# Altium PCB AX309.REV.1.0.PcbDoc (part 6 of 10)
Units mil, origin at the board's own origin, x right, y up, seen from the top; angles counter-clockwise.
Board outline 5185 x 3614 mil, 4 copper layers (Top Layer, GND, Mid-Layer 1, Bottom Layer); 191 components, 352 nets, 1106 pads, 425 vias.
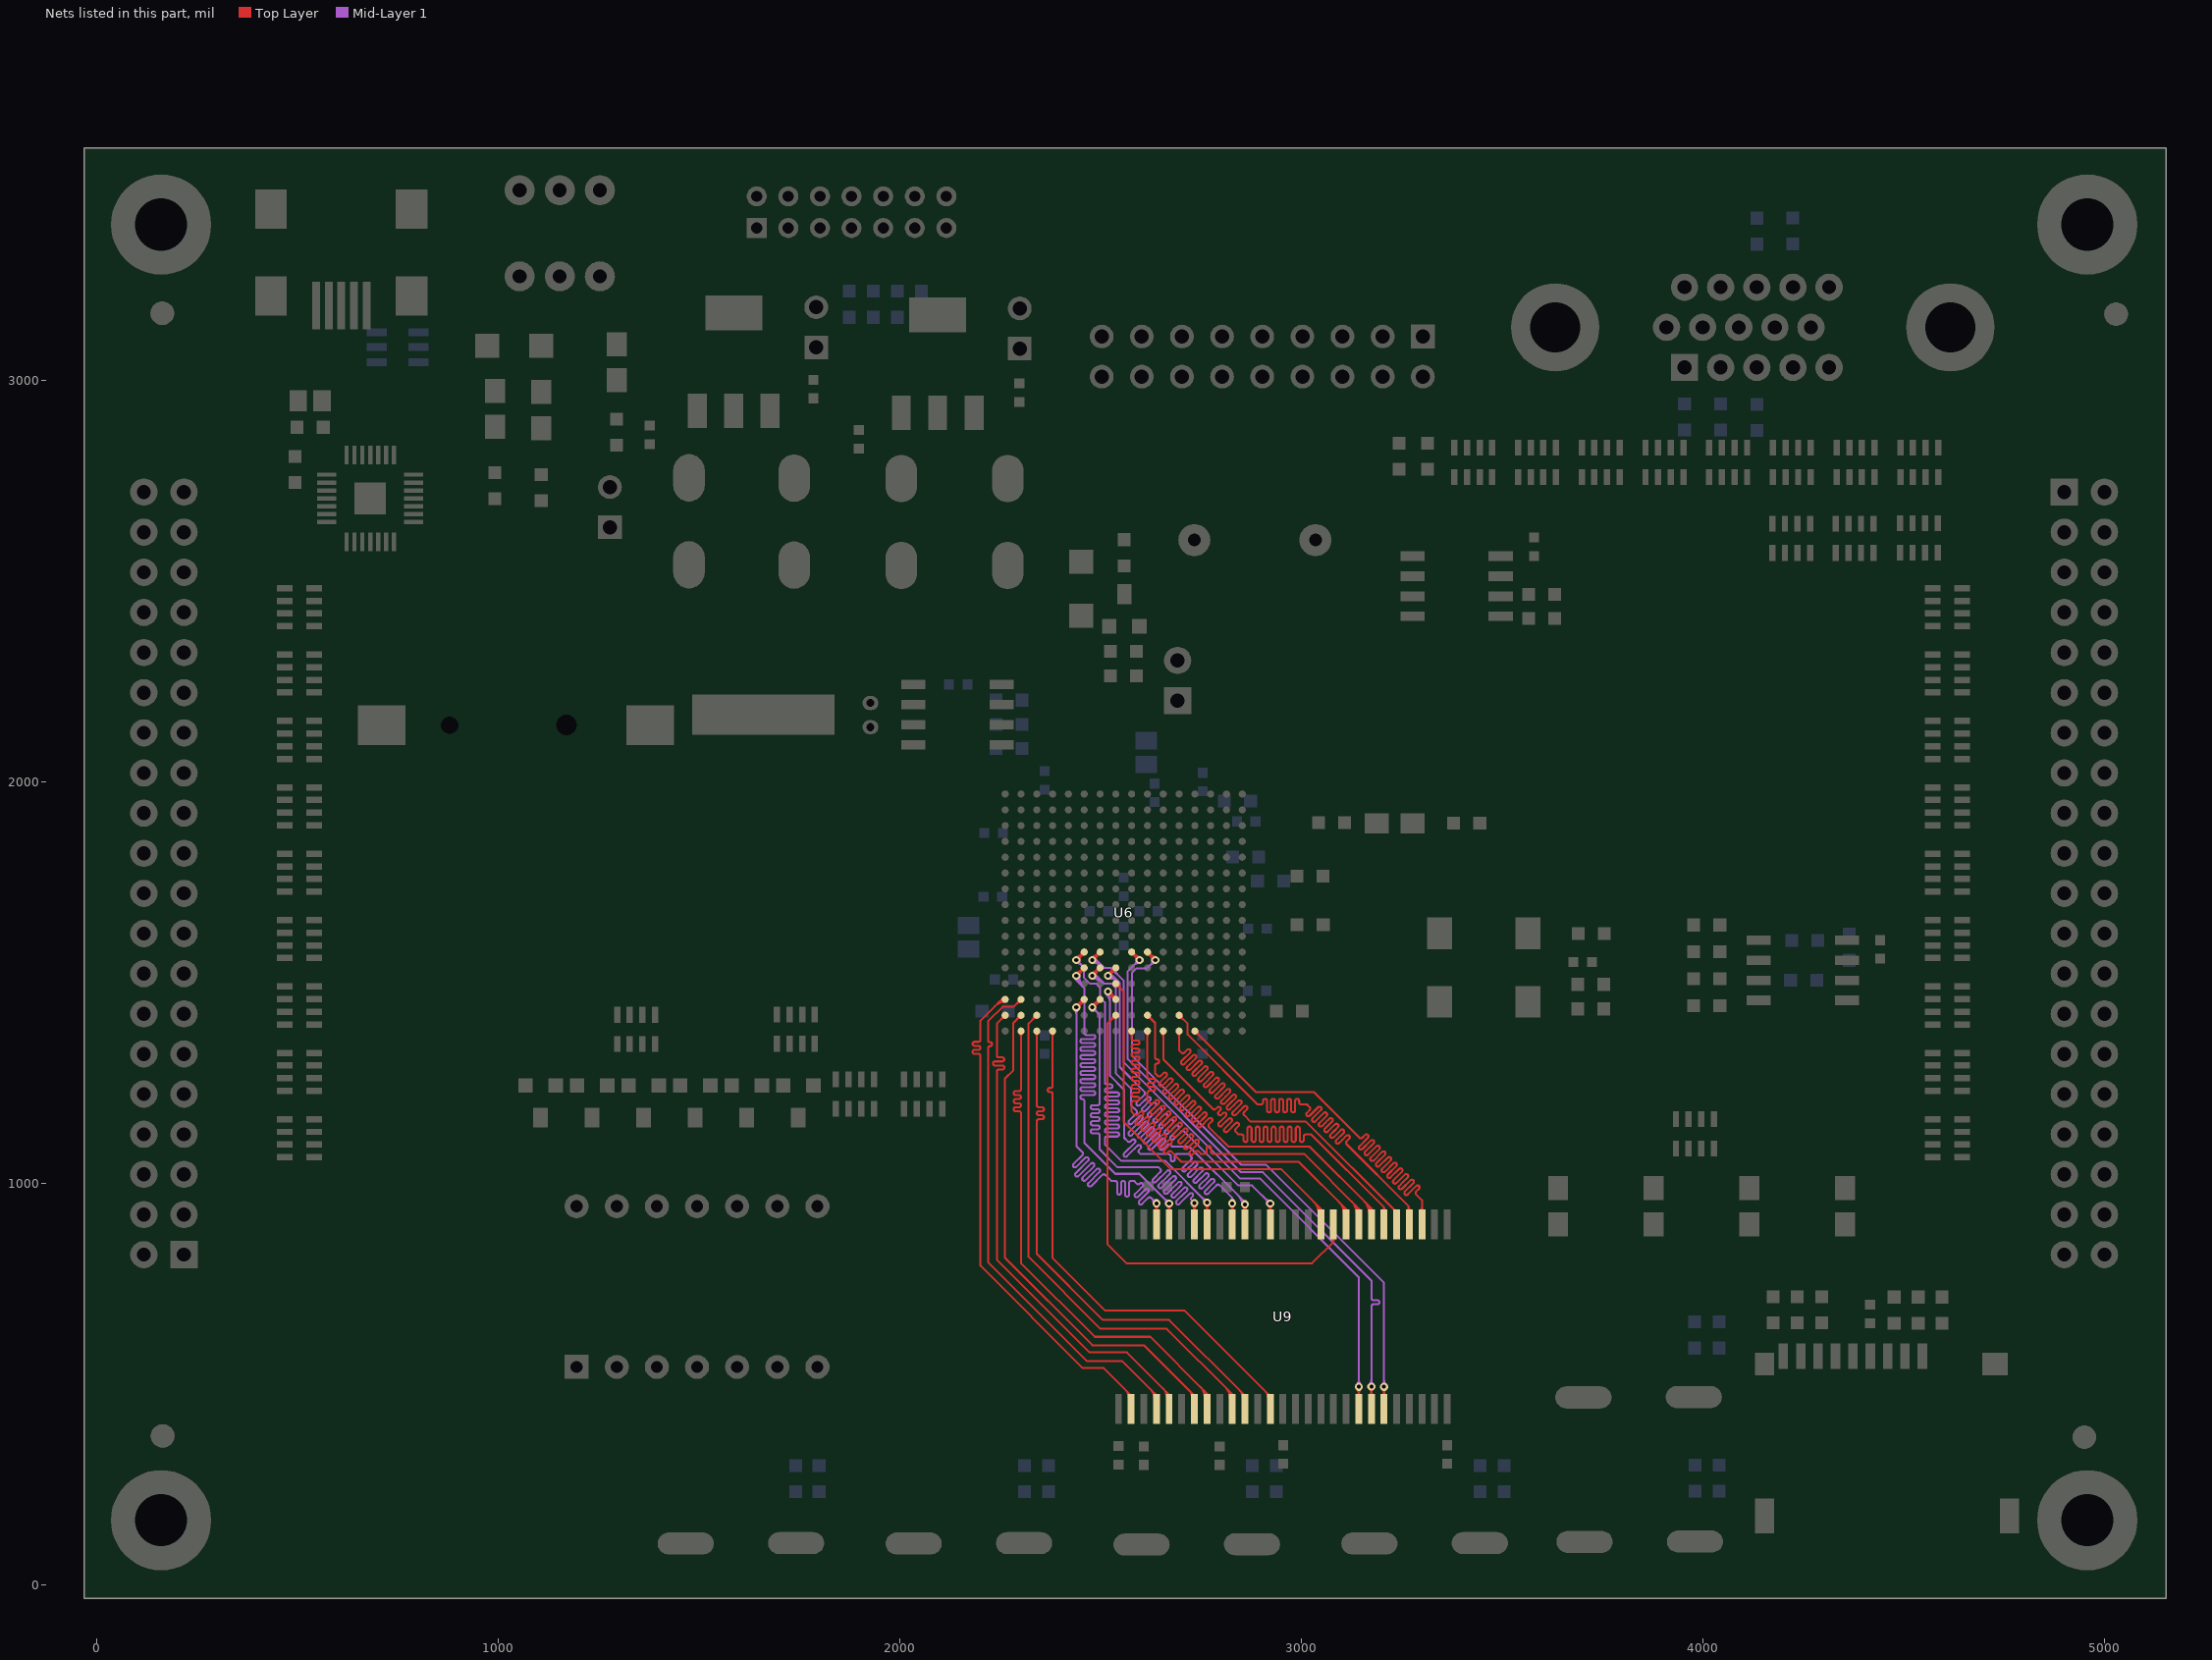
[diagram p8: the nets of this part, all layers, seen from the top]

## Via types
v1: diameter 20, hole 10, Top Layer to Bottom Layer, 328 vias
v2: diameter 30, hole 15, Top Layer to Bottom Layer, 95 vias
v3: diameter 40, hole 20, Top Layer to Bottom Layer, 2 vias

## Nets (pads, with @x,y where several pads share a name; then routed paths per layer and width w, separated by ;. In a path a pad name is that pad's centre, name@x,y a point inside that pad or via, vN(x,y) a via of type N, cw(c..) or ccw(c..) an arc to the next point about the centre after c; other vN are vias at no path point) (continued)
S_A5: U6.N1 U9.30 | length 1517.2
  Top Layer w5: U6.N1@2735.17,1372.37 cw(c2735.17,1357.02) 2746.02,1367.87 cw(c2756.87,1378.72) U6.N1@2741.52,1378.72 ; U6.N1@2735.17,1378.72 2886.89,1227 3031,1227 3145,1113 ccw(c3148.54,1116.54) 3152.07,1113 3159.06,1119.99 cw(c3162.6,1116.46) 3166.13,1119.99 cw(c3162.6,1116.46) 3166.13,1112.92 3145.08,1091.87 ccw(c3148.62,1088.33) 3145.08,1084.8 ccw(c3148.62,1088.33) 3152.15,1084.8 3173.2,1105.85 cw(c3176.74,1102.31) 3180.28,1105.85 cw(c3176.74,1102.31) 3180.28,1098.78 3159.22,1077.72 ccw(c3162.76,1074.19) 3159.22,1070.65 ccw(c3162.76,1074.19) 3166.29,1070.65 3187.35,1091.71 cw(c3190.88,1088.17) 3194.42,1091.71 cw(c3190.88,1088.17) 3194.42,1084.64 3173.36,1063.58 ccw(c3176.9,1060.05) 3173.36,1056.51 ccw(c3176.9,1060.05) 3180.43,1056.51 3201.49,1077.57 cw(c3205.02,1074.03) 3208.56,1077.57 cw(c3205.02,1074.03) 3208.56,1070.49 3187.51,1049.44 ccw(c3191.04,1045.9) 3187.51,1042.37 ccw(c3191.04,1045.9) 3194.58,1042.37 3215.63,1063.42 cw(c3219.17,1059.89) 3222.7,1063.42 cw(c3219.17,1059.89) 3222.7,1056.35 3201.65,1035.3 ccw(c3205.18,1031.76) 3201.65,1028.23 ccw(c3205.18,1031.76) 3208.72,1028.23 3229.77,1049.28 cw(c3233.31,1045.75) 3236.84,1049.28 cw(c3233.31,1045.75) 3236.84,1042.21 3215.79,1021.16 ccw(c3219.33,1017.62) 3215.79,1014.08 ccw(c3219.33,1017.62) 3222.86,1014.08 3243.92,1035.14 cw(c3247.45,1031.6) 3250.99,1035.14 cw(c3247.45,1031.6) 3250.99,1028.07 3229.93,1007.01 ccw(c3233.47,1003.48) 3229.93,999.94 ccw(c3233.47,1003.48) 3237,999.94 3258.06,1021 cw(c3261.59,1017.46) 3265.13,1021 cw(c3261.59,1017.46) 3265.13,1013.93 3254.6,1003.4 3244.07,992.87 ccw(c3247.61,989.34) 3244.07,985.8 ccw(c3247.61,989.34) 3251.15,985.8 3272.2,1006.85 cw(c3275.74,1003.32) 3279.27,1006.85 cw(c3275.74,1003.32) 3279.27,999.78 3258.22,978.73 ccw(c3261.75,975.19) 3258.22,971.66 ccw(c3261.75,975.19) 3265.29,971.66 3286.34,992.71 cw(c3289.88,989.18) 3293.41,992.71 cw(c3289.88,989.18) 3293.41,985.64 3286.42,978.65 ccw(c3289.96,975.11) 3286.42,971.58 3300.91,957.09 U9.30@3300.91,897 ; U9.30@3296.66,930.24 ccw(c3286.42,940.49) 3300.91,940.49 ccw(c3315.39,940.49) U9.30@3305.15,930.24
S_A6: U6.M2 U9.31 | length 1514.3
  Top Layer w5: U6.M2@2695.8,1411.74 cw(c2695.8,1396.39) 2706.65,1407.24 cw(c2717.5,1418.09) U6.M2@2702.15,1418.09 ; U6.M2@2695.8,1418.09 2717,1396.89 2717,1370 2891,1196 2900,1196 ccw(c2900,1201) 2905,1201 2905,1204.8 cw(c2910,1204.8) 2910,1209.8 cw(c2910,1204.8) 2915,1204.8 2915,1181.2 ccw(c2920,1181.2) 2920,1176.2 ccw(c2920,1181.2) 2925,1181.2 2925,1204.8 cw(c2930,1204.8) 2930,1209.8 cw(c2930,1204.8) 2935,1204.8 2935,1181.2 ccw(c2940,1181.2) 2940,1176.2 ccw(c2940,1181.2) 2945,1181.2 2945,1204.8 cw(c2950,1204.8) 2950,1209.8 cw(c2950,1204.8) 2955,1204.8 2955,1181.2 ccw(c2960,1181.2) 2960,1176.2 ccw(c2960,1181.2) 2965,1181.2 2965,1204.8 cw(c2970,1204.8) 2970,1209.8 cw(c2970,1204.8) 2975,1204.8 2975,1181.2 ccw(c2980,1181.2) 2980,1176.2 ccw(c2980,1181.2) 2985,1181.2 2985,1204.8 cw(c2990,1204.8) 2990,1209.8 cw(c2990,1204.8) 2995,1204.8 2995,1201 ccw(c3000,1201) 3000,1196 3014,1196 3021.07,1188.93 cw(c3017.54,1185.39) 3021.07,1181.86 3014.14,1174.93 ccw(c3017.68,1171.39) 3014.14,1167.86 ccw(c3017.68,1171.39) 3021.21,1167.86 3042.14,1188.79 cw(c3045.68,1185.25) 3049.22,1188.79 cw(c3045.68,1185.25) 3049.22,1181.72 3028.28,1160.78 ccw(c3031.82,1157.25) 3028.28,1153.71 ccw(c3031.82,1157.25) 3035.35,1153.71 3056.29,1174.65 cw(c3059.82,1171.11) 3063.36,1174.65 cw(c3059.82,1171.11) 3063.36,1167.58 3045.14,1149.35 ccw(c3048.67,1145.82) 3045.14,1142.28 ccw(c3048.67,1145.82) 3052.21,1142.28 3059.96,1150.04 3070.43,1160.51 cw(c3073.96,1156.97) 3077.5,1160.5 cw(c3073.96,1156.97) 3077.5,1153.43 3059.28,1135.21 ccw(c3062.81,1131.68) 3059.28,1128.14 ccw(c3062.81,1131.68) 3066.35,1128.14 3084.57,1146.36 cw(c3088.11,1142.83) 3091.64,1146.36 cw(c3088.11,1142.83) 3091.64,1139.29 3081.18,1128.82 3073.42,1121.07 ccw(c3076.96,1117.53) 3073.42,1114 ccw(c3076.96,1117.53) 3080.49,1114 3098.71,1132.22 cw(c3102.25,1128.69) 3105.78,1132.22 cw(c3102.25,1128.69) 3105.78,1125.15 3087.56,1106.93 ccw(c3091.1,1103.39) 3087.56,1099.86 ccw(c3091.1,1103.39) 3094.63,1099.86 3102.39,1107.61 3112.86,1118.08 cw(c3116.39,1114.54) 3119.93,1118.08 cw(c3116.39,1114.54) 3119.93,1111.01 3112.99,1104.08 ccw(c3116.53,1100.54) 3112.99,1097.01 3267.5,942.5 ; U9.31@3265.17,930.24 ccw(c3259.53,935.88) 3267.5,935.88 ; U9.31@3267.5,898.91 3267.5,942.5 ; U9.31@3273.17,930.68 cw(c3282.66,942.5) 3267.5,942.5
S_A7: U6.M1 U9.32 | length 1542
  Top Layer w5: U6.M1@2691.3,1374.23 cw(c2680.45,1363.37) 2695.8,1363.37 cw(c2711.15,1363.37) U6.M1@2700.29,1374.23 ; U6.M1@2695.8,1378.72 2695.8,1331.2 2702,1325 ccw(c2705.54,1328.54) 2709.07,1325 2716.1,1332.03 cw(c2719.64,1328.5) 2723.17,1332.03 cw(c2719.64,1328.5) 2723.17,1324.96 2702.04,1303.83 ccw(c2705.57,1300.29) 2702.04,1296.75 ccw(c2705.57,1300.29) 2709.11,1296.75 2730.25,1317.89 cw(c2733.78,1314.35) 2737.32,1317.89 cw(c2733.78,1314.35) 2737.32,1310.82 2716.18,1289.68 ccw(c2719.72,1286.15) 2716.18,1282.61 ccw(c2719.72,1286.15) 2723.25,1282.61 2744.39,1303.75 cw(c2747.92,1300.21) 2751.46,1303.75 cw(c2747.92,1300.21) 2751.46,1296.68 2730.32,1275.54 ccw(c2733.86,1272.01) 2730.32,1268.47 ccw(c2733.86,1272.01) 2737.39,1268.47 2758.53,1289.61 cw(c2762.06,1286.07) 2765.6,1289.61 cw(c2762.06,1286.07) 2765.6,1282.53 2744.47,1261.4 ccw(c2748,1257.86) 2744.47,1254.33 ccw(c2748,1257.86) 2751.54,1254.33 2772.67,1275.46 cw(c2776.21,1271.93) 2779.74,1275.46 cw(c2776.21,1271.93) 2779.74,1268.39 2758.61,1247.26 ccw(c2762.14,1243.72) 2758.61,1240.19 ccw(c2762.14,1243.72) 2765.68,1240.19 2786.81,1261.32 cw(c2790.35,1257.79) 2793.88,1261.32 cw(c2790.35,1257.79) 2793.88,1254.25 2772.75,1233.12 ccw(c2776.29,1229.58) 2772.75,1226.04 ccw(c2776.29,1229.58) 2779.82,1226.04 2800.96,1247.18 cw(c2804.49,1243.64) 2808.03,1247.18 cw(c2804.49,1243.64) 2808.03,1240.11 2786.89,1218.97 ccw(c2790.43,1215.44) 2786.89,1211.9 ccw(c2790.43,1215.44) 2793.96,1211.9 2815.1,1233.04 cw(c2818.63,1229.5) 2822.17,1233.04 cw(c2818.63,1229.5) 2822.17,1225.97 2811.6,1215.4 2801.64,1205.43 ccw(c2805.17,1201.9) 2801.64,1198.36 ccw(c2805.17,1201.9) 2808.71,1198.36 2818.67,1208.33 2829.24,1218.89 cw(c2832.78,1215.36) 2836.31,1218.89 cw(c2832.78,1215.36) 2836.31,1211.82 2825.74,1201.26 2815.78,1191.29 ccw(c2819.32,1187.76) 2815.78,1184.22 ccw(c2819.32,1187.76) 2822.85,1184.22 2832.81,1194.19 2843.38,1204.75 cw(c2846.92,1201.22) 2850.45,1204.75 cw(c2846.92,1201.22) 2850.45,1197.68 2839.89,1187.11 2829.92,1177.15 ccw(c2833.46,1173.61) 2829.92,1170.08 ccw(c2833.46,1173.61) 2836.99,1170.08 2846.96,1180.04 2857.52,1190.61 cw(c2861.06,1187.07) 2864.6,1190.61 cw(c2861.06,1187.07) 2864.6,1183.54 2857.56,1176.51 ccw(c2861.1,1172.97) 2857.56,1169.44 2874,1153 3012,1153 U9.32@3237.91,927.09 ; 3226.9,938.1 cw(c3214.8,926) U9.32@3231.91,926 ; 3229.53,935.47 ccw(c3237.91,943.86) U9.32@3237.91,932
S_A8: U6.L1 U9.33 | length 1539.8
  Top Layer w5: U6.L1@2651.93,1374.23 cw(c2641.08,1363.37) 2656.43,1363.37 cw(c2671.78,1363.37) U6.L1@2660.92,1374.23 ; U6.L1@2656.43,1378.72 2656.43,1308.57 2780.36,1184.64 ccw(c2783.9,1188.18) 2787.43,1184.64 2791.14,1188.35 cw(c2794.68,1184.81) 2798.21,1188.35 cw(c2794.68,1184.81) 2798.21,1181.28 2794.5,1177.57 ccw(c2798.04,1174.03) 2794.5,1170.5 ccw(c2798.04,1174.03) 2801.57,1170.5 2805.28,1174.21 cw(c2808.82,1170.67) 2812.35,1174.21 cw(c2808.82,1170.67) 2812.35,1167.14 2805.11,1159.89 2794.76,1149.54 ccw(c2798.29,1146) 2794.76,1142.47 ccw(c2798.29,1146) 2801.83,1142.47 2819.43,1160.06 cw(c2822.96,1156.53) 2826.5,1160.06 cw(c2822.96,1156.53) 2826.5,1152.99 2819.25,1145.75 2808.9,1135.4 ccw(c2812.43,1131.86) 2808.9,1128.32 ccw(c2812.43,1131.86) 2815.97,1128.32 2836.68,1149.03 cw(c2840.21,1145.5) 2843.75,1149.03 cw(c2840.21,1145.5) 2843.75,1141.96 2836.93,1135.14 ccw(c2840.46,1131.61) 2836.93,1128.07 2844,1121 2851.39,1121 cw(c2851.39,1116) 2856.39,1116 2856.39,1107.36 ccw(c2861.39,1107.36) 2861.39,1102.36 ccw(c2861.39,1107.36) 2866.39,1107.36 2866.39,1135.64 cw(c2871.39,1135.64) 2871.39,1140.64 cw(c2871.39,1135.64) 2876.39,1135.64 2876.39,1107.36 ccw(c2881.39,1107.36) 2881.39,1102.36 ccw(c2881.39,1107.36) 2886.39,1107.36 2886.39,1135.64 cw(c2891.39,1135.64) 2891.39,1140.64 cw(c2891.39,1135.64) 2896.39,1135.64 2896.39,1107.36 ccw(c2901.39,1107.36) 2901.39,1102.36 ccw(c2901.39,1107.36) 2906.39,1107.36 2906.39,1135.64 cw(c2911.39,1135.64) 2911.39,1140.64 cw(c2911.39,1135.64) 2916.39,1135.64 2916.39,1107.36 ccw(c2921.39,1107.36) 2921.39,1102.36 ccw(c2921.39,1107.36) 2926.39,1107.36 2926.39,1135.64 cw(c2931.39,1135.64) 2931.39,1140.64 cw(c2931.39,1135.64) 2936.39,1135.64 2936.39,1107.36 ccw(c2941.39,1107.36) 2941.39,1102.36 ccw(c2941.39,1107.36) 2946.39,1107.36 2946.39,1135.64 cw(c2951.39,1135.64) 2951.39,1140.64 cw(c2951.39,1135.64) 2956.39,1135.64 2956.39,1107.36 ccw(c2961.39,1107.36) 2961.39,1102.36 ccw(c2961.39,1107.36) 2966.39,1107.36 2966.39,1135.64 cw(c2971.39,1135.64) 2971.39,1140.64 cw(c2971.39,1135.64) 2976.39,1135.64 2976.39,1107.36 ccw(c2981.39,1107.36) 2981.39,1102.36 ccw(c2981.39,1107.36) 2986.39,1107.36 2986.39,1135.64 cw(c2991.39,1135.64) 2991.39,1140.64 cw(c2991.39,1135.64) 2996.39,1135.64 2996.39,1107.36 ccw(c3001.39,1107.36) 3001.39,1102.36 ccw(c3001.39,1107.36) 3006.39,1107.36 3006.39,1116 cw(c3011.39,1116) 3011.39,1121 3025,1121 3206.42,939.58 ; U9.33@3202.38,930.44 ccw(c3194.04,939.58) 3206.42,939.58 ; U9.33@3206.42,897 3206.42,939.58 ; U9.33@3210.46,930.44 cw(c3218.79,939.58) 3206.42,939.58
S_A9: U6.K2 U9.34 | length 1576.9
  Top Layer w5: U6.K2@2617.06,1411.74 cw(c2617.06,1396.39) 2627.91,1407.24 cw(c2638.76,1418.09) U6.K2@2623.41,1418.09 ; U6.K2@2617.06,1418.09 2636,1399.15 2636,1313 ccw(c2641,1313) 2641,1308 2641.33,1308 cw(c2641.33,1303) 2646.33,1303 cw(c2641.33,1303) 2641.33,1298 2641,1298 ccw(c2641,1293) 2636,1293 2636,1274 2643.07,1266.93 ccw(c2646.61,1270.46) 2650.14,1266.93 2657.14,1273.93 cw(c2660.68,1270.39) 2664.21,1273.93 cw(c2660.68,1270.39) 2664.21,1266.86 2653.68,1256.32 2647.22,1249.87 ccw(c2650.76,1246.33) 2647.22,1242.8 ccw(c2650.76,1246.33) 2654.3,1242.8 2660.75,1249.25 2671.28,1259.79 cw(c2674.82,1256.25) 2678.35,1259.79 cw(c2674.82,1256.25) 2678.35,1252.72 2657.28,1231.65 ccw(c2660.82,1228.11) 2657.28,1224.57 ccw(c2660.82,1228.11) 2664.36,1224.57 2685.43,1245.64 cw(c2688.96,1242.11) 2692.5,1245.64 cw(c2688.96,1242.11) 2692.5,1238.57 2671.43,1217.5 ccw(c2674.96,1213.97) 2671.43,1210.43 ccw(c2674.96,1213.97) 2678.5,1210.43 2699.57,1231.5 cw(c2703.1,1227.97) 2706.64,1231.5 cw(c2703.1,1227.97) 2706.64,1224.43 2685.57,1203.36 ccw(c2689.1,1199.83) 2685.57,1196.29 ccw(c2689.1,1199.83) 2692.64,1196.29 2713.71,1217.36 cw(c2717.25,1213.82) 2720.78,1217.36 cw(c2717.25,1213.82) 2720.78,1210.29 2699.71,1189.22 ccw(c2703.25,1185.68) 2699.71,1182.15 ccw(c2703.25,1185.68) 2706.78,1182.15 2727.85,1203.22 cw(c2731.39,1199.68) 2734.92,1203.22 cw(c2731.39,1199.68) 2734.92,1196.15 2713.85,1175.08 ccw(c2717.39,1171.54) 2713.85,1168.01 ccw(c2717.39,1171.54) 2720.92,1168.01 2741.99,1189.08 cw(c2745.53,1185.54) 2749.07,1189.08 cw(c2745.53,1185.54) 2749.07,1182 2728,1160.93 ccw(c2731.53,1157.4) 2728,1153.86 ccw(c2731.53,1157.4) 2735.07,1153.86 2745.6,1164.4 2756.14,1174.93 cw(c2759.67,1171.4) 2763.21,1174.93 cw(c2759.67,1171.4) 2763.21,1167.86 2742.14,1146.79 ccw(c2745.67,1143.26) 2742.14,1139.72 ccw(c2745.67,1143.26) 2749.21,1139.72 2770.28,1160.79 cw(c2773.81,1157.26) 2777.35,1160.79 cw(c2773.81,1157.26) 2777.35,1153.72 2770.35,1146.72 ccw(c2773.89,1143.19) 2770.35,1139.65 2819,1091 3021,1091 3175,937 ; 3156.98,955.02 cw(c3127.96,926) U9.34@3169,926 ; 3165.51,946.49 cw(c3145.03,926) U9.34@3174,926 ; U9.34@3171.75,931.04 ccw(c3167.92,937) 3175,937 ; 3174.05,937.95 cw(c3162.1,926) U9.34@3179,926 ; U9.34@3175,897 3175,937 ; U9.34@3178.25,931.04 cw(c3182.08,937) 3175,937
S_A10: U6.K6 U9.22 | length 1742.1
  Top Layer w5: U6.K6@2617.06,1569.22 cw(c2617.06,1553.87) 2627.91,1564.72 cw(c2638.76,1575.57) U6.K6@2623.41,1575.57 ; U6.K6@2617.06,1575.57 v1(2636.74,1555.89) ; U6.K6@2619.41,1569.63 cw(c2609.33,1552.17) v1@2629.31,1554.88 ; U6.K6@2623,1573.22 ccw(c2640.46,1583.3) v1@2637.75,1563.32 ; 2626.29,1565.65 cw(c2622.84,1559.67) v1@2629.5,1557.86 ; 2626.98,1566.34 ccw(c2632.96,1569.79) v1@2634.77,1563.13 ; 2628.1,1564.39 ccw(c2638.73,1570.53) v1@2637.08,1558.37 ; 2628.24,1564.53 cw(c2622.1,1553.9) v1@2634.26,1555.55 ; v1@2629.24,1555.89 ccw(c2611.13,1555.89) 2623.94,1568.69 ccw(c2636.74,1581.5) v1@2636.74,1563.39 ; v1@3201.11,487.11 cw(c3188.31,474.31) 3206.42,474.31 cw(c3224.52,474.31) v1@3211.72,487.11 ; U9.22@3202.17,470.24 ccw(c3191.93,480.49) 3206.42,480.49 ccw(c3220.9,480.49) U9.22@3210.66,470.24 ; U9.22@3206.42,437 v1(3206.42,492.42) ; v1@2629.5,1557.83 ccw(c2622.67,1559.66) 2628.79,1563.19 cw(c2622.67,1559.66) v1@2629.5,1557.83 ; 2629.44,1563.84 ccw(c2632.97,1569.96) 2634.8,1563.13 cw(c2632.97,1569.96) 2629.44,1563.84
  Mid-Layer 1 w5: v1@2629.24,1555.89 cw(c2611.13,1555.89) 2623.94,1543.09 cw(c2636.74,1530.28) v1@2636.74,1548.39 ; v1(2636.74,1555.89) 2615.85,1535 2590,1535 2579,1524 2579,1317 2850,1046 2912,1046 3206.42,751.58 v1(3206.42,492.42) ; v1@3201.11,497.72 ccw(c3188.31,510.52) 3206.42,510.52 ccw(c3224.52,510.52) v1@3211.72,497.72
S_A11: U6.K1 U9.35 | length 1573.4
  Top Layer w5: U6.K1@2612.56,1374.23 cw(c2601.7,1363.37) 2617.06,1363.37 cw(c2632.41,1363.37) U6.K1@2621.55,1374.23 ; U6.K1@2617.06,1378.72 2617.06,1265 ccw(c2622.06,1265) 2622.06,1260 2631.59,1260 cw(c2631.59,1255) 2636.59,1255 cw(c2631.59,1255) 2631.59,1250 2622.06,1250 ccw(c2622.06,1245) 2617.06,1245 ccw(c2622.06,1245) 2622.06,1240 2631.59,1240 cw(c2631.59,1235) 2636.59,1235 cw(c2631.59,1235) 2631.59,1230 2622.06,1230 ccw(c2622.06,1225) 2617.06,1225 2617.06,1205.94 2624.13,1198.87 ccw(c2627.66,1202.41) 2631.2,1198.87 2637.94,1205.62 cw(c2641.48,1202.08) 2645.01,1205.62 cw(c2641.48,1202.08) 2645.01,1198.55 2634.73,1188.27 2626.13,1179.66 ccw(c2629.66,1176.13) 2626.13,1172.59 ccw(c2629.66,1176.13) 2633.2,1172.59 2641.8,1181.2 2652.08,1191.48 cw(c2655.62,1187.94) 2659.16,1191.48 cw(c2655.62,1187.94) 2659.16,1184.41 2640.27,1165.52 ccw(c2643.81,1161.99) 2640.27,1158.45 ccw(c2643.81,1161.99) 2647.34,1158.45 2655.95,1167.05 2666.23,1177.33 cw(c2669.76,1173.8) 2673.3,1177.33 cw(c2669.76,1173.8) 2673.3,1170.26 2663.02,1159.98 2654.41,1151.38 ccw(c2657.95,1147.84) 2654.41,1144.31 ccw(c2657.95,1147.84) 2661.48,1144.31 2670.09,1152.91 2680.37,1163.19 cw(c2683.9,1159.66) 2687.44,1163.19 cw(c2683.9,1159.66) 2687.44,1156.12 2677.16,1145.84 2668.56,1137.24 ccw(c2672.09,1133.7) 2668.56,1130.17 ccw(c2672.09,1133.7) 2675.63,1130.17 2684.23,1138.77 2694.51,1149.05 cw(c2698.05,1145.52) 2701.58,1149.05 cw(c2698.05,1145.52) 2701.58,1141.98 2691.3,1131.7 2682.7,1123.09 ccw(c2686.23,1119.56) 2682.7,1116.02 ccw(c2686.23,1119.56) 2689.77,1116.02 2698.37,1124.63 2708.65,1134.91 cw(c2712.19,1131.37) 2715.72,1134.91 cw(c2712.19,1131.37) 2715.72,1127.84 2695.16,1107.28 ccw(c2698.7,1103.74) 2695.16,1100.2 ccw(c2698.7,1103.74) 2702.23,1100.2 2722.8,1120.77 cw(c2726.33,1117.23) 2729.87,1120.77 cw(c2726.33,1117.23) 2729.87,1113.7 2709.3,1093.13 ccw(c2712.84,1089.6) 2709.3,1086.06 ccw(c2712.84,1089.6) 2716.38,1086.06 2726.66,1096.34 2736.94,1106.62 cw(c2740.47,1103.09) 2744.01,1106.62 cw(c2740.47,1103.09) 2744.01,1099.55 2723.45,1078.99 ccw(c2726.98,1075.46) 2723.45,1071.92 ccw(c2726.98,1075.46) 2730.52,1071.92 2737.26,1078.67 cw(c2740.8,1075.13) 2744.33,1078.67 2750,1073 2760,1073 ccw(c2760,1078) 2765,1078 2765,1087.54 cw(c2770,1087.54) 2770,1092.54 cw(c2770,1087.54) 2775,1087.54 2775,1078 ccw(c2780,1078) 2780,1073 3007,1073 3143.43,936.57 ; 3125.71,954.29 cw(c3097.41,926) U9.35@3137.43,926 ; 3134.24,945.76 cw(c3114.48,926) U9.35@3142.43,926 ; U9.35@3140.35,931.15 ccw(c3137.11,936.57) 3143.43,936.57 ; 3142.78,937.22 cw(c3131.55,926) U9.35@3147.43,926 ; U9.35@3143.43,897 3143.43,936.57 ; U9.35@3146.5,931.15 cw(c3149.74,936.57) 3143.43,936.57
S_A12: U6.J1 U9.36 | length 1560.2
  Top Layer w5: U6.J1@2573.19,1374.23 cw(c2562.33,1363.37) 2577.68,1363.37 cw(c2593.04,1363.37) U6.J1@2582.18,1374.23 ; U6.J1@2577.68,1378.72 2577.68,1360 ccw(c2582.68,1360) 2582.68,1355 2592.28,1355 cw(c2592.28,1350) 2597.28,1350 cw(c2592.28,1350) 2592.28,1345 2582.68,1345 ccw(c2582.68,1340) 2577.68,1340 ccw(c2582.68,1340) 2582.68,1335 2592.28,1335 cw(c2592.28,1330) 2597.28,1330 cw(c2592.28,1330) 2592.28,1325 2582.68,1325 ccw(c2582.68,1320) 2577.68,1320 ccw(c2582.68,1320) 2582.68,1315 2592.28,1315 cw(c2592.28,1310) 2597.28,1310 cw(c2592.28,1310) 2592.28,1305 2582.68,1305 ccw(c2582.68,1300) 2577.68,1300 ccw(c2582.68,1300) 2582.68,1295 2592.28,1295 cw(c2592.28,1290) 2597.28,1290 cw(c2592.28,1290) 2592.28,1285 2582.68,1285 ccw(c2582.68,1280) 2577.68,1280 ccw(c2582.68,1280) 2582.68,1275 2592.28,1275 cw(c2592.28,1270) 2597.28,1270 cw(c2592.28,1270) 2592.28,1265 2582.68,1265 ccw(c2582.68,1260) 2577.68,1260 ccw(c2582.68,1260) 2582.68,1255 2592.28,1255 cw(c2592.28,1250) 2597.28,1250 cw(c2592.28,1250) 2592.28,1245 2582.68,1245 ccw(c2582.68,1240) 2577.68,1240 ccw(c2582.68,1240) 2582.68,1235 2592.28,1235 cw(c2592.28,1230) 2597.28,1230 cw(c2592.28,1230) 2592.28,1225 2582.68,1225 ccw(c2582.68,1220) 2577.68,1220 ccw(c2582.68,1220) 2582.68,1215 2592.28,1215 cw(c2592.28,1210) 2597.28,1210 cw(c2592.28,1210) 2592.28,1205 2582.68,1205 ccw(c2582.68,1200) 2577.68,1200 2577.68,1177.32 2584.76,1170.24 ccw(c2588.29,1173.78) 2591.83,1170.24 2598.61,1177.03 cw(c2602.15,1173.49) 2605.68,1177.03 cw(c2602.15,1173.49) 2605.68,1169.96 2595.36,1159.64 2588.75,1153.03 ccw(c2592.29,1149.49) 2588.75,1145.96 ccw(c2592.29,1149.49) 2595.83,1145.96 2602.43,1152.57 2612.75,1162.89 cw(c2616.29,1159.35) 2619.83,1162.89 cw(c2616.29,1159.35) 2619.83,1155.82 2602.9,1138.89 ccw(c2606.43,1135.35) 2602.9,1131.82 ccw(c2606.43,1135.35) 2609.97,1131.82 2616.58,1138.42 2626.9,1148.74 cw(c2630.43,1145.21) 2633.97,1148.74 cw(c2630.43,1145.21) 2633.97,1141.67 2623.65,1131.35 2617.04,1124.74 ccw(c2620.57,1121.21) 2617.04,1117.67 ccw(c2620.57,1121.21) 2624.11,1117.67 2641.04,1134.6 cw(c2644.57,1131.07) 2648.11,1134.6 cw(c2644.57,1131.07) 2648.11,1127.53 2637.79,1117.21 2631.18,1110.6 ccw(c2634.72,1107.07) 2631.18,1103.53 ccw(c2634.72,1107.07) 2638.25,1103.53 2644.86,1110.14 2655.18,1120.46 cw(c2658.72,1116.92) 2662.25,1120.46 cw(c2658.72,1116.92) 2662.25,1113.39 2645.32,1096.46 ccw(c2648.86,1092.92) 2645.32,1089.39 ccw(c2648.86,1092.92) 2652.39,1089.39 2659,1096 2669.32,1106.32 cw(c2672.86,1102.78) 2676.39,1106.32 cw(c2672.86,1102.78) 2676.39,1099.25 2666.07,1088.93 2659.47,1082.32 ccw(c2663,1078.78) 2659.47,1075.25 ccw(c2663,1078.78) 2666.54,1075.25 2669.61,1078.32 cw(c2673.14,1074.78) 2676.68,1078.32 2702,1053 2993.93,1053 3111.93,935 ; 3095.32,951.61 cw(c3069.72,926) U9.36@3105.93,926 ; 3103.86,943.07 cw(c3086.79,926) U9.36@3110.93,926 ; U9.36@3109.62,931.54 ccw(c3108.18,935) 3111.93,935 ; U9.36@3111.93,897 3111.93,935 ; 3112.39,934.54 cw(c3103.86,926) U9.36@3115.93,926 ; U9.36@3114.24,931.54 cw(c3115.68,935) 3111.93,935
S_BA0: U6.G6 U9.20 | length 1782.8
  Top Layer w5: v1@2478.25,1563.32 ccw(c2475.54,1583.3) U6.G6@2493,1573.22 ; v1@2478.92,1558.37 ccw(c2477.27,1570.53) 2487.9,1564.39 ; v1(2479.26,1555.89) U6.G6@2498.94,1575.57 ; v1@2479.26,1563.39 ccw(c2479.26,1581.5) 2492.06,1568.69 ccw(c2504.87,1555.89) v1@2486.76,1555.89 ; v1@2481.23,1563.13 ccw(c2483.04,1569.79) 2489.02,1566.34 ; v1@2481.74,1555.55 cw(c2493.9,1553.9) 2487.76,1564.53 ; v1@2486.69,1554.88 cw(c2506.67,1552.17) U6.G6@2496.59,1569.63 ; 2489.71,1565.65 ccw(c2493.16,1559.67) v1@2486.5,1557.86 ; U6.G6@2492.59,1575.57 cw(c2477.24,1575.57) 2488.09,1564.72 cw(c2498.94,1553.87) U6.G6@2498.94,1569.22 ; v1@3138.12,487.12 cw(c3125.32,474.32) 3143.43,474.32 cw(c3161.53,474.32) v1@3148.73,487.12 ; U9.20@3139.18,470.24 ccw(c3128.94,480.49) 3143.43,480.49 ccw(c3157.91,480.49) U9.20@3147.67,470.24 ; U9.20@3143.43,437 v1(3143.43,492.43) ; v1@2486.5,1557.83 cw(c2493.33,1559.66) 2487.21,1563.19 ccw(c2493.33,1559.66) v1@2486.5,1557.83 ; v1@2481.2,1563.13 ccw(c2483.03,1569.96) 2486.56,1563.84 cw(c2483.03,1569.96) v1@2481.2,1563.13
  Mid-Layer 1 w5: v1@2479.22,1558.39 cw(c2479.54,1538.91) 2493.32,1552.68 ; v1(2479.26,1555.89) 2490.11,1555.89 ; v1@2479.3,1553.39 cw(c2479.81,1522.49) 2501.66,1544.34 ; v1@2479.38,1548.39 cw(c2480.08,1506.08) 2510,1536 ; v1@2486.27,1553.24 cw(c2490.11,1551.79) 2490.11,1555.89 ; v1@2486.27,1558.54 ccw(c2490.11,1559.99) 2490.11,1555.89 ; v1@3138.12,497.73 ccw(c3125.32,510.53) 3143.43,510.53 ccw(c3161.53,510.53) v1@3148.73,497.73 ; v1(3143.43,492.43) 3143.43,765.57 2898,1011 2848,1011 2558,1301 2558,1504 2526,1536 2510,1536 ; 2490.11,1555.89 2510,1536
S_BA1: U6.J6 U9.21 | length 1734.6
  Top Layer w5: U6.J6@2577.68,1569.22 cw(c2577.68,1553.87) 2588.54,1564.72 cw(c2599.39,1575.57) U6.J6@2584.04,1575.57 ; U6.J6@2577.68,1575.57 v1(2597.37,1555.89) ; U6.J6@2580.04,1569.63 cw(c2569.96,1552.17) v1@2589.94,1554.88 ; U6.J6@2583.63,1573.22 ccw(c2601.09,1583.3) v1@2598.38,1563.32 ; 2586.92,1565.65 cw(c2583.47,1559.67) v1@2590.13,1557.86 ; 2587.61,1566.34 ccw(c2593.59,1569.79) v1@2595.4,1563.13 ; 2588.73,1564.39 ccw(c2599.36,1570.53) v1@2597.71,1558.37 ; 2588.87,1564.53 cw(c2582.73,1553.9) v1@2594.89,1555.55 ; v1@2589.87,1555.89 ccw(c2571.76,1555.89) 2584.57,1568.69 ccw(c2597.37,1581.5) v1@2597.37,1563.39 ; v1@3169.62,487.62 cw(c3156.81,474.81) 3174.92,474.81 cw(c3193.03,474.81) v1@3180.22,487.62 ; U9.21@3170.68,470.24 ccw(c3160.44,480.49) 3174.92,480.49 ccw(c3189.41,480.49) U9.21@3179.16,470.24 ; U9.21@3174.92,437 v1(3174.92,492.92) ; v1@2590.13,1557.83 ccw(c2583.3,1559.66) 2589.42,1563.19 cw(c2583.3,1559.66) v1@2590.13,1557.83 ; 2590.07,1563.84 ccw(c2593.6,1569.96) 2595.43,1563.13 cw(c2593.6,1569.96) 2590.07,1563.84
  Mid-Layer 1 w5: 2582.04,1542.04 cw(c2597.37,1526.7) v1@2597.37,1548.39 ; 2585.62,1545.62 ccw(c2575.34,1555.89) v1@2589.87,1555.89 ; v1(2597.37,1555.89) 2595.89,1555.89 2568,1528 2568,1309 2850,1027 2905,1027 3174.92,757.08 3174.92,713 ccw(c3179.92,713) 3179.92,708 3189.76,708 cw(c3189.76,703) 3194.76,703 cw(c3189.76,703) 3189.76,698 3179.92,698 ccw(c3179.92,693) 3174.92,693 v1(3174.92,492.92) ; v1@3169.62,498.22 ccw(c3156.81,511.03) 3174.92,511.03 ccw(c3193.03,511.03) v1@3180.22,498.22
S_CKE: U6.H2 U9.37 | length 1274
  Top Layer w5: U6.H2@2531.96,1418.09 cw(c2516.61,1418.09) 2527.46,1407.24 cw(c2538.32,1396.39) U6.H2@2538.32,1411.74 ; U6.H2@2538.32,1418.09 2518,1397.78 2518,847 2565,800 3027,800 3080.43,853.43 U9.37@3080.43,897 ; U9.37@3076.19,863.76 cw(c3065.95,853.51) 3080.43,853.51 cw(c3094.92,853.51) U9.37@3084.68,863.76
S_CLK: U6.H4 U9.38 | length 1070.6
  Top Layer w5: U6.H4@2538.32,1490.48 cw(c2538.32,1475.13) 2549.17,1485.98 cw(c2560.02,1496.83) U6.H4@2544.67,1496.83 ; U6.H4@2538.32,1496.83 2558,1477.15 2558,1152 2675,1035 2949.94,1035 3048.94,936 ; 3031.62,953.31 cw(c3004.31,926) U9.38@3042.94,926 ; 3040.16,944.78 cw(c3021.38,926) U9.38@3047.94,926 ; U9.38@3046.11,931.29 ccw(c3043.6,936) 3048.94,936 ; 3048.69,936.24 cw(c3038.45,926) U9.38@3052.94,926 ; U9.38@3048.94,897 3048.94,936 ; U9.38@3051.76,931.29 cw(c3054.27,936) 3048.94,936
S_DB0: U6.A3 U9.2 | length 1398
  Top Layer w5: 2236.06,1440.06 cw(c2262.72,1413.4) U6.A3@2262.72,1451.11 ; 2244.6,1448.6 cw(c2262.72,1430.47) U6.A3@2262.72,1456.11 ; 2253.13,1457.13 cw(c2262.72,1447.54) U6.A3@2262.72,1461.11 ; U6.A3@2256.79,1455.18 ccw(c2253.47,1453.9) 2253.47,1457.46 ; U6.A3@2256.79,1459.75 cw(c2253.47,1461.03) 2253.47,1457.46 ; U6.A3@2262.72,1457.46 2253.46,1457.46 ; 2563.07,483.93 cw(c2545.14,466) U9.2@2570.5,466 ; 2571.6,475.4 cw(c2562.21,466) U9.2@2575.5,466 ; U9.2@2576.5,437 2576.5,470.5 2508,539 2456,539 2201,794 2201,1317 ccw(c2196,1317) 2196,1322 2186.41,1322 cw(c2186.41,1327) 2181.41,1327 cw(c2186.41,1327) 2186.41,1332 2196,1332 ccw(c2196,1337) 2201,1337 ccw(c2196,1337) 2196,1342 2186.41,1342 cw(c2186.41,1347) 2181.41,1347 cw(c2186.41,1347) 2186.41,1352 2196,1352 ccw(c2196,1357) 2201,1357 2201,1405 2253.46,1457.46
S_DB1: U6.B3 U9.4 | length 1365.7
  Top Layer w5: U6.B3@2295.74,1457.46 cw(c2280.39,1457.46) 2291.24,1446.61 cw(c2302.09,1435.76) U6.B3@2302.09,1451.11 ; U6.B3@2302.09,1457.46 2283.63,1439 2256,1439 2220,1403 2220,1356 ccw(c2225,1356) 2225,1351 cw(c2225,1346) 2230,1346 cw(c2225,1346) 2225,1341 ccw(c2225,1336) 2220,1336 2220,803 2466,557 2554,557 2639.49,471.51 U9.4@2639.49,437 ; 2625.35,485.65 cw(c2605.7,466) U9.4@2633.49,466 ; 2633.88,477.12 cw(c2622.77,466) U9.4@2638.49,466
S_DB2: U6.A2 U9.5 | length 1362.6
  Top Layer w5: U6.A2@2256.37,1418.09 cw(c2241.02,1418.09) 2251.87,1407.24 cw(c2262.72,1396.39) U6.A2@2262.72,1411.74 ; U6.A2@2262.72,1418.09 2242,1397.37 2242,1318 ccw(c2247,1318) 2247,1313 2255.49,1313 cw(c2255.49,1308) 2260.49,1308 cw(c2255.49,1308) 2255.49,1303 2237,1303 ccw(c2237,1298) 2232,1298 ccw(c2237,1298) 2237,1293 2255.49,1293 cw(c2255.49,1288) 2260.49,1288 cw(c2255.49,1288) 2255.49,1283 2247,1283 ccw(c2247,1278) 2242,1278 2242,809 2473,578 2565.98,578 2670.98,473 U9.5@2670.98,437 ; 2655.79,488.19 cw(c2633.6,466) U9.5@2664.98,466 ; 2664.33,479.66 cw(c2650.67,466) U9.5@2669.98,466
S_DB3: U6.B2 U9.7 | length 1355.8
  Top Layer w5: U6.B2@2295.74,1418.09 cw(c2280.39,1418.09) 2291.24,1407.24 cw(c2302.09,1396.39) U6.B2@2302.09,1411.74 ; U6.B2@2302.09,1418.09 2283,1399 2283,1281 2262,1260 2262,814 2480,596 2608,596 2733.98,470.02 U9.7@2733.98,437 U9.7@2734,472.02 ; 2720.89,483.11 cw(c2703.78,466) U9.7@2727.98,466 ; 2729.42,474.58 cw(c2720.85,466) U9.7@2732.98,466
S_DB4: U6.B1 U9.8 | length 1392.9
  Top Layer w5: U6.B1@2297.6,1374.23 cw(c2286.74,1363.37) 2302.09,1363.37 cw(c2317.44,1363.37) U6.B1@2306.59,1374.23 ; U6.B1@2302.09,1378.72 2302.09,1234 cw(c2297.09,1234) 2297.09,1229 2288.78,1229 ccw(c2288.78,1224) 2283.78,1224 ccw(c2288.78,1224) 2288.78,1219 2297.09,1219 cw(c2297.09,1214) 2302.09,1214 cw(c2297.09,1214) 2297.09,1209 2288.78,1209 ccw(c2288.78,1204) 2283.78,1204 ccw(c2288.78,1204) 2288.78,1199 2297.09,1199 cw(c2297.09,1194) 2302.09,1194 cw(c2297.09,1194) 2297.09,1189 2288.78,1189 ccw(c2288.78,1184) 2283.78,1184 ccw(c2288.78,1184) 2288.78,1179 2297.09,1179 cw(c2297.09,1174) 2302.09,1174 2302.09,800.91 2486,617 2624,617 2765.47,475.53 ; 2748.49,492.51 cw(c2721.99,466) U9.8@2759.47,466 ; 2757.03,483.97 cw(c2739.06,466) U9.8@2764.47,466 ; U9.8@2762.88,471.41 ccw(c2760.91,475.53) 2765.47,475.53 ; U9.8@2765.47,437 2765.47,475.53 ; 2765.56,475.44 cw(c2756.13,466) U9.8@2769.47,466 ; U9.8@2768.06,471.41 cw(c2770.04,475.53) 2765.47,475.53
S_DB5: U6.C2 U9.10 | length 1362.4
  Top Layer w5: U6.C2@2335.11,1418.09 cw(c2319.76,1418.09) 2330.61,1407.24 cw(c2341.46,1396.39) U6.C2@2341.46,1411.74 ; U6.C2@2341.46,1418.09 2321,1397.63 2321,816 2500,637 2665,637 2828.46,473.54 U9.10@2828.46,437 ; 2812.89,489.11 cw(c2789.79,466) U9.10@2822.46,466 ; 2821.43,480.57 cw(c2806.86,466) U9.10@2827.46,466
S_DB6: U6.C1 U9.11 | length 1360
  Top Layer w5: U6.C1@2336.97,1374.23 cw(c2326.11,1363.37) 2341.46,1363.37 cw(c2356.81,1363.37) U6.C1@2345.96,1374.23 ; U6.C1@2341.46,1378.72 2341.46,1194 ccw(c2346.46,1194) 2346.46,1189 2354.31,1189 cw(c2354.31,1184) 2359.31,1184 cw(c2354.31,1184) 2354.31,1179 2346.46,1179 ccw(c2346.46,1174) 2341.46,1174 ccw(c2346.46,1174) 2346.46,1169 2354.31,1169 cw(c2354.31,1164) 2359.31,1164 cw(c2354.31,1164) 2354.31,1159 2346.46,1159 ccw(c2346.46,1154) 2341.46,1154 2341.46,823.54 2506,659 2671,659 2859.99,470.01 U9.11@2859.99,437 ; 2846.92,483.08 cw(c2829.83,466) U9.11@2853.99,466 ; 2855.45,474.55 cw(c2846.9,466) U9.11@2858.99,466
S_DB7: U6.D1 U9.13 | length 1345.5
  Top Layer w5: U6.D1@2376.34,1374.23 cw(c2365.48,1363.37) 2380.83,1363.37 cw(c2396.18,1363.37) U6.D1@2385.33,1374.23 ; U6.D1@2380.83,1378.72 2380.83,1242 cw(c2375.83,1242) 2375.83,1237 2373.36,1237 ccw(c2373.36,1232) 2368.36,1232 ccw(c2373.36,1232) 2373.36,1227 2375.83,1227 cw(c2375.83,1222) 2380.83,1222 2380.83,813.17 2512,682 2710,682 2922.95,469.05 U9.13@2922.95,437 ; 2910.56,481.44 cw(c2895.11,466) U9.13@2916.95,466 ; U9.13@2917.91,474.09 ccw(c2922.95,479.13) U9.13@2922.95,472
S_DB8: U6.H5 U9.42 | length 1641.6
  Top Layer w5: v1@2517.62,1523.95 ccw(c2514.91,1543.93) U6.H5@2532.37,1533.85 ; v1@2518.29,1519 ccw(c2516.64,1531.16) 2527.27,1525.02 ; v1(2518.63,1516.52) U6.H5@2538.32,1536.2 ; v1@2518.63,1524.02 ccw(c2518.63,1542.13) 2531.43,1529.32 ccw(c2544.24,1516.52) v1@2526.13,1516.52 ; v1@2520.6,1523.76 ccw(c2522.41,1530.42) 2528.39,1526.97 ; v1@2521.11,1516.18 cw(c2533.27,1514.53) 2527.13,1525.16 ; v1@2525.87,1518.49 cw(c2532.53,1520.3) 2529.08,1526.28 ; v1@2526.06,1515.51 cw(c2546.04,1512.8) U6.H5@2535.96,1530.26 ; U6.H5@2531.96,1536.2 cw(c2516.61,1536.2) 2527.46,1525.35 cw(c2538.32,1514.5) U6.H5@2538.32,1529.85 ; v1@2917.65,943.74 cw(c2904.85,930.94) 2922.95,930.94 cw(c2941.06,930.94) v1@2928.26,943.74 ; U9.42@2918.71,930.24 ccw(c2908.47,940.49) 2922.95,940.49 ccw(c2937.44,940.49) U9.42@2927.2,930.24 ; v1@2919.52,942.38 cw(c2915.58,934.72) 2923.9,936.95 cw(c2928.42,938.16) v1@2926.32,942.35 ; v1@2919.59,942.35 cw(c2917.48,938.16) 2922.01,936.95 cw(c2930.32,934.72) v1@2926.38,942.38 ; U9.42@2922.95,897 v1(2922.95,949.05) ; v1@2520.57,1523.76 ccw(c2522.4,1530.59) 2525.93,1524.47 cw(c2522.4,1530.59) v1@2520.57,1523.76 ; v1@2525.87,1518.46 cw(c2532.7,1520.29) 2526.58,1523.82 ccw(c2532.7,1520.29) v1@2525.87,1518.46
  Mid-Layer 1 w5: v1@2518.36,1519 cw(c2520.33,1500.85) 2533.24,1513.76 ; v1(2518.63,1516.52) 2530.48,1516.52 ; v1@2518.9,1514.03 cw(c2521.77,1487.54) 2540.62,1506.38 ; v1@2519.44,1509.06 cw(c2523.22,1474.22) 2548,1499 ; v1@2525.41,1513.31 cw(c2530.48,1510.9) 2530.48,1516.52 ; v1@2525.41,1519.73 ccw(c2530.48,1522.13) 2530.48,1516.52 ; v1@2915.45,949.05 ccw(c2897.35,949.05) 2910.15,961.85 ccw(c2922.95,974.65) v1@2922.95,956.55 ; v1(2922.95,949.05) 2878,994 2843,994 2708.57,1128.43 ccw(c2705.03,1124.9) 2701.5,1128.43 2682.48,1109.42 cw(c2678.95,1112.96) 2675.41,1109.42 cw(c2678.95,1112.96) 2675.41,1116.49 2694.42,1135.51 ccw(c2690.89,1139.04) 2694.42,1142.58 ccw(c2690.89,1139.04) 2687.35,1142.58 2668.34,1123.56 cw(c2664.8,1127.1) 2661.27,1123.56 cw(c2664.8,1127.1) 2661.27,1130.63 2680.28,1149.65 ccw(c2676.75,1153.18) 2680.28,1156.72 ccw(c2676.75,1153.18) 2673.21,1156.72 2654.2,1137.71 cw(c2650.66,1141.24) 2647.13,1137.71 cw(c2650.66,1141.24) 2647.13,1144.78 2666.14,1163.79 ccw(c2662.6,1167.32) 2666.14,1170.86 ccw(c2662.6,1167.32) 2659.07,1170.86 2640.06,1151.85 cw(c2636.52,1155.38) 2632.98,1151.85 cw(c2636.52,1155.38) 2632.98,1158.92 2652,1177.93 ccw(c2648.46,1181.47) 2652,1185 ccw(c2648.46,1181.47) 2644.93,1185 2625.91,1165.99 cw(c2622.38,1169.53) 2618.84,1165.99 cw(c2622.38,1169.53) 2618.84,1173.06 2637.86,1192.07 ccw(c2634.32,1195.61) 2637.86,1199.14 ccw(c2634.32,1195.61) 2630.78,1199.14 2611.77,1180.13 cw(c2608.24,1183.67) 2604.7,1180.13 cw(c2608.24,1183.67) 2604.7,1187.2 2623.71,1206.22 ccw(c2620.18,1209.75) 2623.71,1213.29 ccw(c2620.18,1209.75) 2616.64,1213.29 2597.63,1194.27 cw(c2594.09,1197.81) 2590.56,1194.27 cw(c2594.09,1197.81) 2590.56,1201.34 2609.57,1220.36 ccw(c2606.04,1223.89) 2609.57,1227.43 2548,1289 2548,1499 ; 2530.48,1516.52 2548,1499
S_DB9: U6.G5 U9.44 | length 1644.5
  Top Layer w5: v1@2478.25,1523.95 ccw(c2475.54,1543.93) U6.G5@2493,1533.85 ; v1@2478.92,1519 ccw(c2477.27,1531.16) 2487.9,1525.02 ; v1(2479.26,1516.52) U6.G5@2498.94,1536.2 ; v1@2479.26,1524.02 ccw(c2479.26,1542.13) 2492.06,1529.32 ccw(c2504.87,1516.52) v1@2486.76,1516.52 ; v1@2481.23,1523.76 ccw(c2483.04,1530.42) 2489.02,1526.97 ; v1@2481.74,1516.18 cw(c2493.9,1514.53) 2487.76,1525.16 ; v1@2486.5,1518.49 cw(c2493.16,1520.3) 2489.71,1526.28 ; v1@2486.69,1515.51 cw(c2506.67,1512.8) U6.G5@2496.59,1530.26 ; U6.G5@2492.59,1536.2 cw(c2477.24,1536.2) 2488.09,1525.35 cw(c2498.94,1514.5) U6.G5@2498.94,1529.85 ; v1@2854.69,941.7 cw(c2841.89,928.9) 2859.99,928.9 cw(c2878.1,928.9) v1@2865.3,941.7 ; U9.44@2855.75,930.24 ccw(c2845.51,940.49) 2859.99,940.49 ccw(c2874.48,940.49) U9.44@2864.23,930.24 ; v1@2856.87,940.19 cw(c2855.4,936.98) 2858.81,936.07 cw(c2864.2,934.62) v1@2862.4,939.91 ; v1@2857.58,939.91 cw(c2855.79,934.62) 2861.18,936.07 cw(c2864.58,936.98) v1@2863.12,940.19 ; U9.44@2859.99,897 v1(2859.99,947.01) ; v1@2481.2,1523.76 ccw(c2483.03,1530.59) 2486.56,1524.47 cw(c2483.03,1530.59) v1@2481.2,1523.76 ; v1@2486.5,1518.46 cw(c2493.33,1520.29) 2487.21,1523.82 ccw(c2493.33,1520.29) v1@2486.5,1518.46
  Mid-Layer 1 w5: v1@2479.22,1519.02 cw(c2479.49,1500.93) 2492.28,1513.72 ; v1(2479.26,1516.52) 2489.48,1516.52 ; v1@2479.3,1514.02 cw(c2479.73,1484.45) 2500.64,1505.36 ; v1@2479.37,1509.02 cw(c2479.97,1467.98) 2509,1497 ; v1@2486.41,1514.27 cw(c2489.48,1513.3) 2489.48,1516.52 ; v1@2486.41,1518.77 ccw(c2489.48,1519.73) 2489.48,1516.52 ; 2843.65,968.35 cw(c2822.31,947.01) v1@2852.49,947.01 ; 2852.19,959.81 cw(c2839.39,947.01) v1@2857.49,947.01 ; 2855.72,956.28 ccw(c2859.99,960.54) v1@2859.99,954.51 ; v1(2859.99,947.01) 2859.99,952.01 2721,1091 2679,1091 2674.42,1095.58 ccw(c2670.89,1092.04) 2667.35,1095.58 2655.89,1084.11 cw(c2652.36,1087.65) 2648.82,1084.11 cw(c2652.36,1087.65) 2648.82,1091.19 2660.28,1102.65 ccw(c2656.75,1106.18) 2660.28,1109.72 ccw(c2656.75,1106.18) 2653.21,1109.72 2627.61,1084.11 cw(c2624.07,1087.65) 2620.54,1084.11 cw(c2624.07,1087.65) 2620.54,1091.19 2646.14,1116.79 ccw(c2642.6,1120.32) 2646.14,1123.86 ccw(c2642.6,1120.32) 2639.07,1123.86 2615.36,1100.15 cw(c2611.83,1103.69) 2608.29,1100.15 cw(c2611.83,1103.69) 2608.29,1107.22 2632,1130.93 ccw(c2628.46,1134.47) 2632,1138 ccw(c2628.46,1134.47) 2624.93,1138 2601.22,1114.29 cw(c2597.68,1117.83) 2594.15,1114.29 cw(c2597.68,1117.83) 2594.15,1121.37 2617.86,1145.07 ccw(c2614.32,1148.61) 2617.86,1152.14 ccw(c2614.32,1148.61) 2610.78,1152.14 2578.19,1119.55 cw(c2574.65,1123.08) 2571.11,1119.55 cw(c2574.65,1123.08) 2571.11,1126.62 2603.71,1159.22 ccw(c2600.18,1162.75) 2603.71,1166.29 ccw(c2600.18,1162.75) 2596.64,1166.29 2578.19,1147.83 cw(c2574.65,1151.37) 2571.11,1147.83 cw(c2574.65,1151.37) 2571.11,1154.9 2589.57,1173.36 ccw(c2586.04,1176.89) 2589.57,1180.43 2576,1194 2576,1236 2538,1274 2538,1487 2528,1497 2509,1497 ; 2489.48,1516.52 2509,1497
S_DB10: U6.H3 U9.45 | length 1595.3
  Top Layer w5: v1@2517.62,1469.72 cw(c2514.91,1449.74) U6.H3@2532.37,1459.82 ; v1@2518.29,1474.67 cw(c2516.64,1462.51) 2527.27,1468.65 ; v1@2518.63,1469.65 cw(c2518.63,1451.54) 2531.43,1464.35 cw(c2544.24,1477.15) v1@2526.13,1477.15 ; v1(2518.63,1477.15) U6.H3@2538.32,1457.46 ; v1@2520.6,1469.91 cw(c2522.41,1463.24) 2528.4,1466.7 ; v1@2521.11,1477.48 ccw(c2533.27,1479.14) 2527.13,1468.51 ; v1@2526.06,1478.16 ccw(c2546.03,1480.87) U6.H3@2535.96,1463.41 ; 2529.07,1467.39 cw(c2532.52,1473.36) v1@2525.87,1475.18 ; U6.H3@2531.96,1457.46 ccw(c2516.61,1457.46) 2527.46,1468.32 ccw(c2538.32,1479.18) U6.H3@2538.32,1463.82 ; v1@2823.16,944.23 cw(c2810.36,931.43) 2828.46,931.43 cw(c2846.57,931.43) v1@2833.77,944.23 ; U9.45@2824.22,930.24 ccw(c2813.98,940.49) 2828.46,940.49 ccw(c2842.95,940.49) U9.45@2832.71,930.24 ; v1@2824.82,942.98 cw(c2820.21,934.71) 2829.36,937.16 cw(c2834.15,938.45) v1@2831.88,942.86 ; v1@2825.04,942.86 cw(c2822.78,938.45) 2827.57,937.16 cw(c2836.72,934.71) v1@2832.11,942.98 ; U9.45@2828.46,897 v1(2828.46,949.54) ; v1@2525.87,1475.21 ccw(c2532.7,1473.38) 2526.58,1469.84 cw(c2532.7,1473.38) v1@2525.87,1475.21 ; v1@2520.57,1469.9 cw(c2522.4,1463.07) 2525.94,1469.2 ccw(c2522.4,1463.07) v1@2520.57,1469.9
  Mid-Layer 1 w5: v1@2513.33,1471.85 cw(c2487.56,1446.08) 2524,1446.08 ; v1@2516.86,1475.38 cw(c2499.63,1458.15) 2524,1458.15 ; v1(2518.63,1477.15) 2524,1471.78 2524,1267.46 2559,1232.46 2559,1113 2568,1104 ccw(c2571.54,1107.54) 2575.07,1104 2578.53,1107.45 ; 2578.53,1107.45 cw(c2582.06,1103.92) 2585.6,1107.45 cw(c2582.06,1103.92) 2585.6,1100.38 2559.15,1073.94 ccw(c2562.69,1070.4) 2559.15,1066.87 ccw(c2562.69,1070.4) 2566.22,1066.87 2585.68,1086.32 2592.67,1093.31 cw(c2596.2,1089.78) 2599.74,1093.31 cw(c2596.2,1089.78) 2599.74,1086.24 2596.28,1082.79 ccw(c2599.82,1079.25) 2596.28,1075.72 2600,1072 2670,1072 cw(c2670,1067) 2675,1067 2675,1058.78 ccw(c2680,1058.78) 2680,1053.78 ccw(c2680,1058.78) 2685,1058.78 2685,1067 cw(c2690,1067) 2690,1072 2719.46,1072 2725.88,1065.59 cw(c2722.34,1062.05) 2725.88,1058.51 2704.67,1037.3 ccw(c2708.2,1033.77) 2704.67,1030.23 ccw(c2708.2,1033.77) 2711.74,1030.23 2732.95,1051.44 cw(c2736.49,1047.91) 2740.02,1051.44 cw(c2736.49,1047.91) 2740.02,1044.37 2718.81,1023.16 ccw(c2722.34,1019.62) 2718.81,1016.09 ccw(c2722.34,1019.62) 2725.88,1016.09 2747.09,1037.3 cw(c2750.63,1033.77) 2754.16,1037.3 cw(c2750.63,1033.77) 2754.16,1030.23 2732.95,1009.02 ccw(c2736.49,1005.48) 2732.95,1001.95 ccw(c2736.49,1005.48) 2740.02,1001.95 2761.23,1023.16 cw(c2764.77,1019.62) 2768.31,1023.16 cw(c2764.77,1019.62) 2768.31,1016.09 2747.09,994.87 ccw(c2750.63,991.34) 2747.09,987.8 ccw(c2750.63,991.34) 2754.16,987.8 2775.38,1009.02 cw(c2778.91,1005.48) 2782.45,1009.02 cw(c2778.91,1005.48) 2782.45,1001.95 2761.23,980.73 ccw(c2764.77,977.2) 2761.23,973.66 ccw(c2764.77,977.2) 2768.31,973.66 2789.52,994.87 cw(c2793.05,991.34) 2796.59,994.87 2828.46,963 ; v1@2824.52,955.91 ccw(c2820.13,963) 2828.46,963 ; v1(2828.46,949.54) 2828.46,963 ; v1@2832.41,955.91 cw(c2836.8,963) 2828.46,963
S_DB11: U6.F6 U9.47 | length 1558.8
  Top Layer w5: v1@2438.88,1563.32 ccw(c2436.17,1583.3) U6.F6@2453.63,1573.22 ; v1@2439.55,1558.37 ccw(c2437.9,1570.53) 2448.53,1564.39 ; v1(2439.89,1555.89) U6.F6@2459.57,1575.57 ; v1@2439.89,1563.39 ccw(c2439.89,1581.5) 2452.69,1568.69 ccw(c2465.5,1555.89) v1@2447.39,1555.89 ; v1@2442.37,1555.55 cw(c2454.53,1553.9) 2448.39,1564.53 ; v1@2447.32,1554.88 cw(c2467.3,1552.17) U6.F6@2457.22,1569.63 ; 2449.65,1566.34 cw(c2443.67,1569.79) v1@2441.86,1563.13 ; 2450.34,1565.65 ccw(c2453.79,1559.67) v1@2447.13,1557.86 ; U6.F6@2453.22,1575.57 cw(c2437.87,1575.57) 2448.72,1564.72 cw(c2459.57,1553.87) U6.F6@2459.57,1569.22 ; v1@2760.17,946.22 cw(c2747.37,933.42) 2765.47,933.42 cw(c2783.58,933.42) v1@2770.78,946.22 ; U9.47@2761.23,930.24 ccw(c2750.99,940.49) 2765.47,940.49 ccw(c2779.96,940.49) U9.47@2769.72,930.24 ; U9.47@2765.47,897 v1(2765.47,951.53) ; v1@2441.83,1563.13 ccw(c2443.66,1569.96) 2447.19,1563.84 cw(c2443.66,1569.96) v1@2441.83,1563.13 ; v1@2447.13,1557.83 cw(c2453.96,1559.66) 2447.84,1563.19 ccw(c2453.96,1559.66) v1@2447.13,1557.83
  Mid-Layer 1 w5: v1@2439.89,1548.39 cw(c2439.89,1530.28) 2452.69,1543.09 cw(c2465.5,1555.89) v1@2447.39,1555.89 ; v1(2439.89,1555.89) 2459,1536.78 2459,1511 2473,1497 2489,1497 2499,1487 2499,1462 2511,1450 2511,1251 ccw(c2516,1251) 2516,1246 2524.74,1246 cw(c2524.74,1241) 2529.74,1241 cw(c2524.74,1241) 2524.74,1236 2516,1236 ccw(c2516,1231) 2511,1231 ccw(c2516,1231) 2516,1226 2541.49,1226 cw(c2541.49,1221) 2546.49,1221 cw(c2541.49,1221) 2541.49,1216 2516,1216 ccw(c2516,1211) 2511,1211 ccw(c2516,1211) 2516,1206 2541.49,1206 cw(c2541.49,1201) 2546.49,1201 cw(c2541.49,1201) 2541.49,1196 2516,1196 ccw(c2516,1191) 2511,1191 ccw(c2516,1191) 2516,1186 2541.49,1186 cw(c2541.49,1181) 2546.49,1181 cw(c2541.49,1181) 2541.49,1176 2516,1176 ccw(c2516,1171) 2511,1171 ccw(c2516,1171) 2516,1166 2541.49,1166 cw(c2541.49,1161) 2546.49,1161 cw(c2541.49,1161) 2541.49,1156 2516,1156 ccw(c2516,1151) 2511,1151 ccw(c2516,1151) 2516,1146 2541.49,1146 cw(c2541.49,1141) 2546.49,1141 cw(c2541.49,1141) 2541.49,1136 2516,1136 ccw(c2516,1131) 2511,1131 ccw(c2516,1131) 2516,1126 2541.49,1126 cw(c2541.49,1121) 2546.49,1121 cw(c2541.49,1121) 2541.49,1116 2516,1116 ccw(c2516,1111) 2511,1111 2511,1096 2552,1055 2662,1055 v1(2765.47,951.53) ; v1@2757.97,951.53 ccw(c2739.87,951.53) 2752.67,964.33 ccw(c2765.47,977.13) v1@2765.47,959.03
S_DB12: U6.G3 U9.48 | length 1559.7
  Top Layer w5: v1@2478.25,1445.21 ccw(c2475.54,1465.19) U6.G3@2493,1455.11 ; v1@2478.92,1440.26 ccw(c2477.27,1452.42) 2487.9,1446.28 ; v1(2479.26,1437.78) U6.G3@2498.94,1457.46 ; v1@2479.26,1445.28 ccw(c2479.26,1463.39) 2492.06,1450.58 ccw(c2504.87,1437.78) v1@2486.76,1437.78 ; v1@2481.23,1445.02 ccw(c2483.04,1451.68) 2489.02,1448.23 ; v1@2481.74,1437.44 cw(c2493.9,1435.79) 2487.76,1446.42 ; v1@2486.5,1439.75 cw(c2493.16,1441.56) 2489.71,1447.54 ; v1@2486.69,1436.77 cw(c2506.67,1434.06) U6.G3@2496.59,1451.52 ; U6.G3@2492.59,1457.46 cw(c2477.24,1457.46) 2488.09,1446.61 cw(c2498.94,1435.76) U6.G3@2498.94,1451.11 ; v1@2728.67,944.72 cw(c2715.87,931.92) 2733.98,931.92 cw(c2752.08,931.92) v1@2739.28,944.72 ; U9.48@2729.73,930.24 ccw(c2719.49,940.49) 2733.98,940.49 ccw(c2748.46,940.49) U9.48@2738.22,930.24 ; v1@2730.23,943.53 cw(c2725.39,935.15) 2734.74,937.65 ; v1@2730.51,943.37 cw(c2728.08,938.73) 2733.14,937.37 ; 2733.22,937.65 cw(c2742.57,935.15) v1@2737.73,943.53 ; U9.48@2733.98,897 v1(2733.98,950.02) ; 2734.81,937.37 cw(c2739.87,938.73) v1@2737.45,943.37 ; v1@2481.2,1445.02 ccw(c2483.03,1451.85) 2486.56,1445.73 cw(c2483.03,1451.85) v1@2481.2,1445.02 ; v1@2486.5,1439.72 cw(c2493.33,1441.55) 2487.21,1445.08 ccw(c2493.33,1441.55) v1@2486.5,1439.72
  Mid-Layer 1 w5: v1@2479.26,1430.28 cw(c2479.26,1412.17) 2492.06,1424.98 cw(c2504.87,1437.78) v1@2486.76,1437.78 ; v1(2479.26,1437.78) 2498,1419.04 2498,1199 cw(c2493,1199) 2493,1194 2480.63,1194 ccw(c2480.63,1189) 2475.63,1189 ccw(c2480.63,1189) 2480.63,1184 2493,1184 cw(c2493,1179) 2498,1179 cw(c2493,1179) 2493,1174 2480.63,1174 ccw(c2480.63,1169) 2475.63,1169 ccw(c2480.63,1169) 2480.63,1164 2493,1164 cw(c2493,1159) 2498,1159 cw(c2493,1159) 2493,1154 2480.63,1154 ccw(c2480.63,1149) 2475.63,1149 ccw(c2480.63,1149) 2480.63,1144 2493,1144 cw(c2493,1139) 2498,1139 cw(c2493,1139) 2493,1134 2480.63,1134 ccw(c2480.63,1129) 2475.63,1129 ccw(c2480.63,1129) 2480.63,1124 2493,1124 cw(c2493,1119) 2498,1119 2498,1084 2543,1039 2645,1039 2649.12,1034.88 cw(c2645.59,1031.34) 2649.12,1027.81 2631.25,1009.93 ccw(c2634.78,1006.4) 2631.25,1002.86 ccw(c2634.78,1006.4) 2638.32,1002.86 2665.62,1030.16 cw(c2669.16,1026.63) 2672.7,1030.16 cw(c2669.16,1026.63) 2672.7,1023.09 2666.8,1017.2 2645.39,995.79 ccw(c2648.93,992.25) 2645.39,988.72 ccw(c2648.93,992.25) 2652.46,988.72 2673.87,1010.13 2679.77,1016.02 cw(c2683.3,1012.49) 2686.84,1016.02 cw(c2683.3,1012.49) 2686.84,1008.95 2659.53,981.65 ccw(c2663.07,978.11) 2659.53,974.58 ccw(c2663.07,978.11) 2666.6,974.58 2688.01,995.99 2693.91,1001.88 cw(c2697.44,998.34) 2700.98,1001.88 cw(c2697.44,998.34) 2700.98,994.81 2695.09,988.91 2678.36,972.19 ccw(c2681.9,968.66) 2678.36,965.12 ccw(c2681.9,968.66) 2685.44,965.12 2708.05,987.74 cw(c2711.59,984.2) 2715.12,987.74 cw(c2711.59,984.2) 2715.12,980.67 2709.23,974.77 2689.77,955.32 ccw(c2693.31,951.78) 2689.77,948.25 ccw(c2693.31,951.78) 2696.84,948.25 2716.3,967.7 2722.19,973.6 cw(c2725.73,970.06) 2729.26,973.6 cw(c2725.73,970.06) 2729.26,966.52 2726.91,964.17 ccw(c2730.44,960.63) 2726.91,957.09 v1(2733.98,950.02)
S_DB13: U6.F5 U9.50 | length 1645.8
  Top Layer w5: v1@2438.88,1523.95 ccw(c2436.17,1543.93) U6.F5@2453.63,1533.85 ; v1@2439.55,1519 ccw(c2437.9,1531.16) 2448.53,1525.02 ; v1(2439.89,1516.52) U6.F5@2459.57,1536.2 ; v1@2439.89,1524.02 ccw(c2439.89,1542.13) 2452.69,1529.32 ccw(c2465.5,1516.52) v1@2447.39,1516.52 ; v1@2442.37,1516.18 cw(c2454.53,1514.53) 2448.39,1525.16 ; v1@2447.13,1518.49 cw(c2453.79,1520.3) 2450.34,1526.28 ; v1@2447.32,1515.51 cw(c2467.3,1512.8) U6.F5@2457.22,1530.26 ; 2449.65,1526.97 cw(c2443.67,1530.42) v1@2441.86,1523.76 ; U6.F5@2453.22,1536.2 cw(c2437.87,1536.2) 2448.72,1525.35 cw(c2459.57,1514.5) U6.F5@2459.57,1529.85 ; v1@2665.68,943.68 cw(c2652.88,930.88) 2670.98,930.88 cw(c2689.09,930.88) v1@2676.29,943.68 ; U9.50@2666.74,930.24 ccw(c2656.5,940.49) 2670.98,940.49 ccw(c2685.47,940.49) U9.50@2675.23,930.24 ; U9.50@2670.98,897 v1(2670.98,948.98) ; v1@2674.34,942.28 ccw(c2676.43,938.13) 2671.94,936.92 ccw(c2663.73,934.72) 2667.58,942.3 cw(c2665.54,938.13) 2670.03,936.92 cw(c2678.24,934.72) v1@2674.39,942.3 ; v1@2441.83,1523.76 ccw(c2443.66,1530.59) 2447.19,1524.47 cw(c2443.66,1530.59) v1@2441.83,1523.76 ; v1@2447.13,1518.46 cw(c2453.96,1520.29) 2447.84,1523.82 ccw(c2453.96,1520.29) v1@2447.13,1518.46
  Mid-Layer 1 w5: v1@2436.92,1509.63 cw(c2434.96,1505.11) 2439.89,1505.11 ; v1@2437.39,1516.57 ccw(c2457.98,1516.14) 2443.42,1501.58 ; v1(2439.89,1516.52) 2439.89,1505.11 ; v1@2442.39,1516.47 ccw(c2474.22,1515.81) 2451.71,1493.29 ; v1@2442.86,1509.63 ccw(c2444.81,1505.11) 2439.89,1505.11 ; v1@2447.39,1516.36 ccw(c2490.47,1515.47) 2460,1485 ; v1@2663.48,948.98 ccw(c2645.38,948.98) 2658.18,961.79 ccw(c2670.98,974.59) v1@2670.98,956.48 ; v1(2670.98,948.98) 2596.97,1023 2537,1023 2460,1100 2460,1204 ccw(c2455,1204) 2455,1209 cw(c2455,1214) 2450,1214 cw(c2455,1214) 2455,1219 2482.09,1219 ccw(c2482.09,1224) 2487.09,1224 ccw(c2482.09,1224) 2482.09,1229 2455,1229 cw(c2455,1234) 2450,1234 cw(c2455,1234) 2455,1239 2482.09,1239 ccw(c2482.09,1244) 2487.09,1244 ccw(c2482.09,1244) 2482.09,1249 2455,1249 cw(c2455,1254) 2450,1254 cw(c2455,1254) 2455,1259 2482.09,1259 ccw(c2482.09,1264) 2487.09,1264 ccw(c2482.09,1264) 2482.09,1269 2455,1269 cw(c2455,1274) 2450,1274 cw(c2455,1274) 2455,1279 2482.09,1279 ccw(c2482.09,1284) 2487.09,1284 ccw(c2482.09,1284) 2482.09,1289 2455,1289 cw(c2455,1294) 2450,1294 cw(c2455,1294) 2455,1299 2482.09,1299 ccw(c2482.09,1304) 2487.09,1304 ccw(c2482.09,1304) 2482.09,1309 2455,1309 cw(c2455,1314) 2450,1314 cw(c2455,1314) 2455,1319 2482.09,1319 ccw(c2482.09,1324) 2487.09,1324 ccw(c2482.09,1324) 2482.09,1329 2455,1329 cw(c2455,1334) 2450,1334 cw(c2455,1334) 2455,1339 2482.09,1339 ccw(c2482.09,1344) 2487.09,1344 ccw(c2482.09,1344) 2482.09,1349 2455,1349 cw(c2455,1354) 2450,1354 cw(c2455,1354) 2455,1359 2482.09,1359 ccw(c2482.09,1364) 2487.09,1364 ccw(c2482.09,1364) 2482.09,1369 2465,1369 cw(c2465,1374) 2460,1374 2460,1485 ; 2439.89,1505.11 2460,1485
S_DB14: U6.F3 U9.51 | length 1587.3
  Top Layer w5: v1@2438.88,1445.21 ccw(c2436.17,1465.19) U6.F3@2453.63,1455.11 ; v1@2439.55,1440.26 ccw(c2437.9,1452.42) 2448.53,1446.28 ; v1(2439.89,1437.78) U6.F3@2459.57,1457.46 ; v1@2439.89,1445.28 ccw(c2439.89,1463.39) 2452.69,1450.58 ccw(c2465.5,1437.78) v1@2447.39,1437.78 ; v1@2442.37,1437.44 cw(c2454.53,1435.79) 2448.39,1446.42 ; v1@2447.13,1439.75 cw(c2453.79,1441.56) 2450.34,1447.54 ; v1@2447.32,1436.77 cw(c2467.3,1434.06) U6.F3@2457.22,1451.52 ; 2449.65,1448.23 cw(c2443.67,1451.68) v1@2441.86,1445.02 ; U6.F3@2453.22,1457.46 cw(c2437.87,1457.46) 2448.72,1446.61 cw(c2459.57,1435.76) U6.F3@2459.57,1451.11 ; v1@2634.18,944.18 cw(c2621.38,931.38) 2639.49,931.38 cw(c2657.59,931.38) v1@2644.79,944.18 ; U9.51@2635.25,930.24 ccw(c2625,940.49) 2639.49,940.49 ccw(c2653.97,940.49) U9.51@2643.73,930.24 ; v1@2635.86,942.92 cw(c2631.32,934.71) 2640.38,937.14 cw(c2645.15,938.42) v1@2642.9,942.81 ; v1@2636.07,942.81 cw(c2633.83,938.42) 2638.59,937.14 cw(c2647.65,934.71) v1@2643.12,942.92 ; U9.51@2639.49,897 v1(2639.49,949.49) ; v1@2441.83,1445.02 ccw(c2443.66,1451.85) 2447.19,1445.73 cw(c2443.66,1451.85) v1@2441.83,1445.02 ; v1@2447.13,1439.72 cw(c2453.96,1441.55) 2447.84,1445.08 ccw(c2453.96,1441.55) v1@2447.13,1439.72
  Mid-Layer 1 w5: v1@2434.59,1432.48 cw(c2421.78,1419.67) 2439.89,1419.67 cw(c2458,1419.67) v1@2445.19,1432.48 ; v1(2439.89,1437.78) 2439.89,1092.11 2455.07,1076.93 cw(c2451.54,1073.39) 2455.07,1069.86 2432.92,1047.7 ccw(c2436.45,1044.17) 2432.92,1040.63 ccw(c2436.45,1044.17) 2439.99,1040.63 2462.14,1062.79 cw(c2465.68,1059.25) 2469.21,1062.79 cw(c2465.68,1059.25) 2469.21,1055.72 2438.41,1024.91 ccw(c2441.95,1021.38) 2438.41,1017.84 ccw(c2441.95,1021.38) 2445.48,1017.84 2476.28,1048.64 cw(c2479.82,1045.11) 2483.36,1048.64 cw(c2479.82,1045.11) 2483.36,1041.57 2455.8,1014.02 ccw(c2459.34,1010.48) 2455.8,1006.95 ccw(c2459.34,1010.48) 2462.87,1006.95 2490.43,1034.5 cw(c2493.96,1030.97) 2497.5,1034.5 cw(c2493.96,1030.97) 2497.5,1027.43 2469.94,999.88 ccw(c2473.48,996.34) 2469.94,992.81 ccw(c2473.48,996.34) 2477.01,992.81 2504.57,1020.36 cw(c2508.1,1016.82) 2511.64,1020.36 2526.5,1005.5 2536.5,1005.5 cw(c2536.5,1000.5) 2541.5,1000.5 2541.5,976.29 ccw(c2546.5,976.29) 2546.5,971.29 ccw(c2546.5,976.29) 2551.5,976.29 2551.5,1000.5 cw(c2556.5,1000.5) 2556.5,1005.5 cw(c2556.5,1000.5) 2561.5,1000.5 2561.5,971.43 ccw(c2566.5,971.43) 2566.5,966.43 ccw(c2566.5,971.43) 2571.5,971.43 2571.5,1000.5 cw(c2576.5,1000.5) 2576.5,1005.5 2583.48,1005.5 2590.55,998.43 ccw(c2594.08,1001.96) 2597.62,998.43 2597.72,998.53 cw(c2601.26,995) 2604.79,998.53 cw(c2601.26,995) 2604.79,991.46 2601.15,987.82 2586.48,973.15 ccw(c2590.01,969.61) 2586.48,966.08 ccw(c2590.01,969.61) 2593.55,966.08 2608.23,980.75 2611.87,984.39 cw(c2615.4,980.86) 2618.94,984.39 cw(c2615.4,980.86) 2618.94,977.32 2596.7,955.08 ccw(c2600.23,951.54) 2596.7,948.01 ccw(c2600.23,951.54) 2603.77,948.01 2618.83,963.07 cw(c2622.37,959.54) 2625.9,963.07 v1(2639.49,949.49) ; v1@2631.99,949.49 ccw(c2613.88,949.49) 2626.68,962.29 ccw(c2639.49,975.09) v1@2639.49,956.99